# Altium PCB PumpBoard.PcbDoc
Units mil, origin at the board's own origin, x right, y up, seen from the top; angles counter-clockwise.
Board outline 2000 x 2751.27 mil, 2 copper layers (Top Layer, Bottom Layer), stack 30.756 mil thick; 70 components, 79 nets, 274 pads, 64 vias.
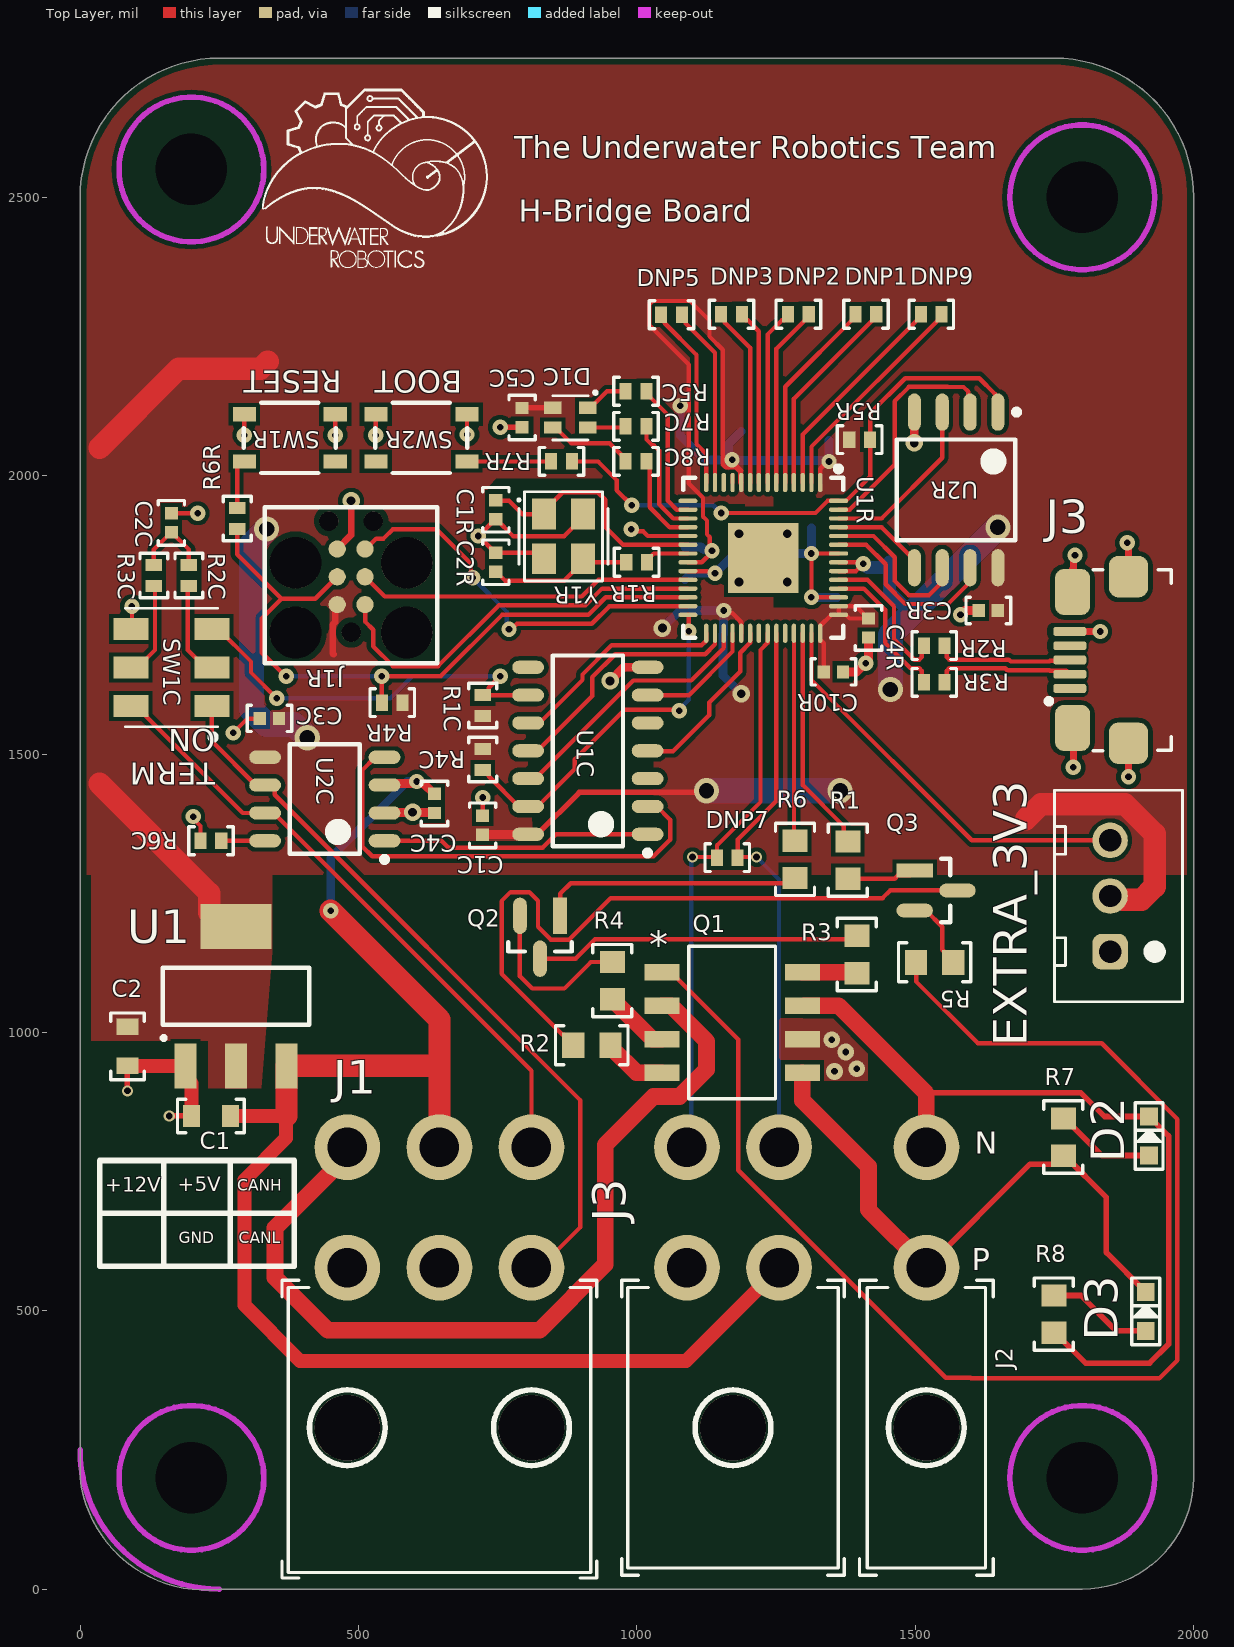
[diagram p0: Top Layer view]
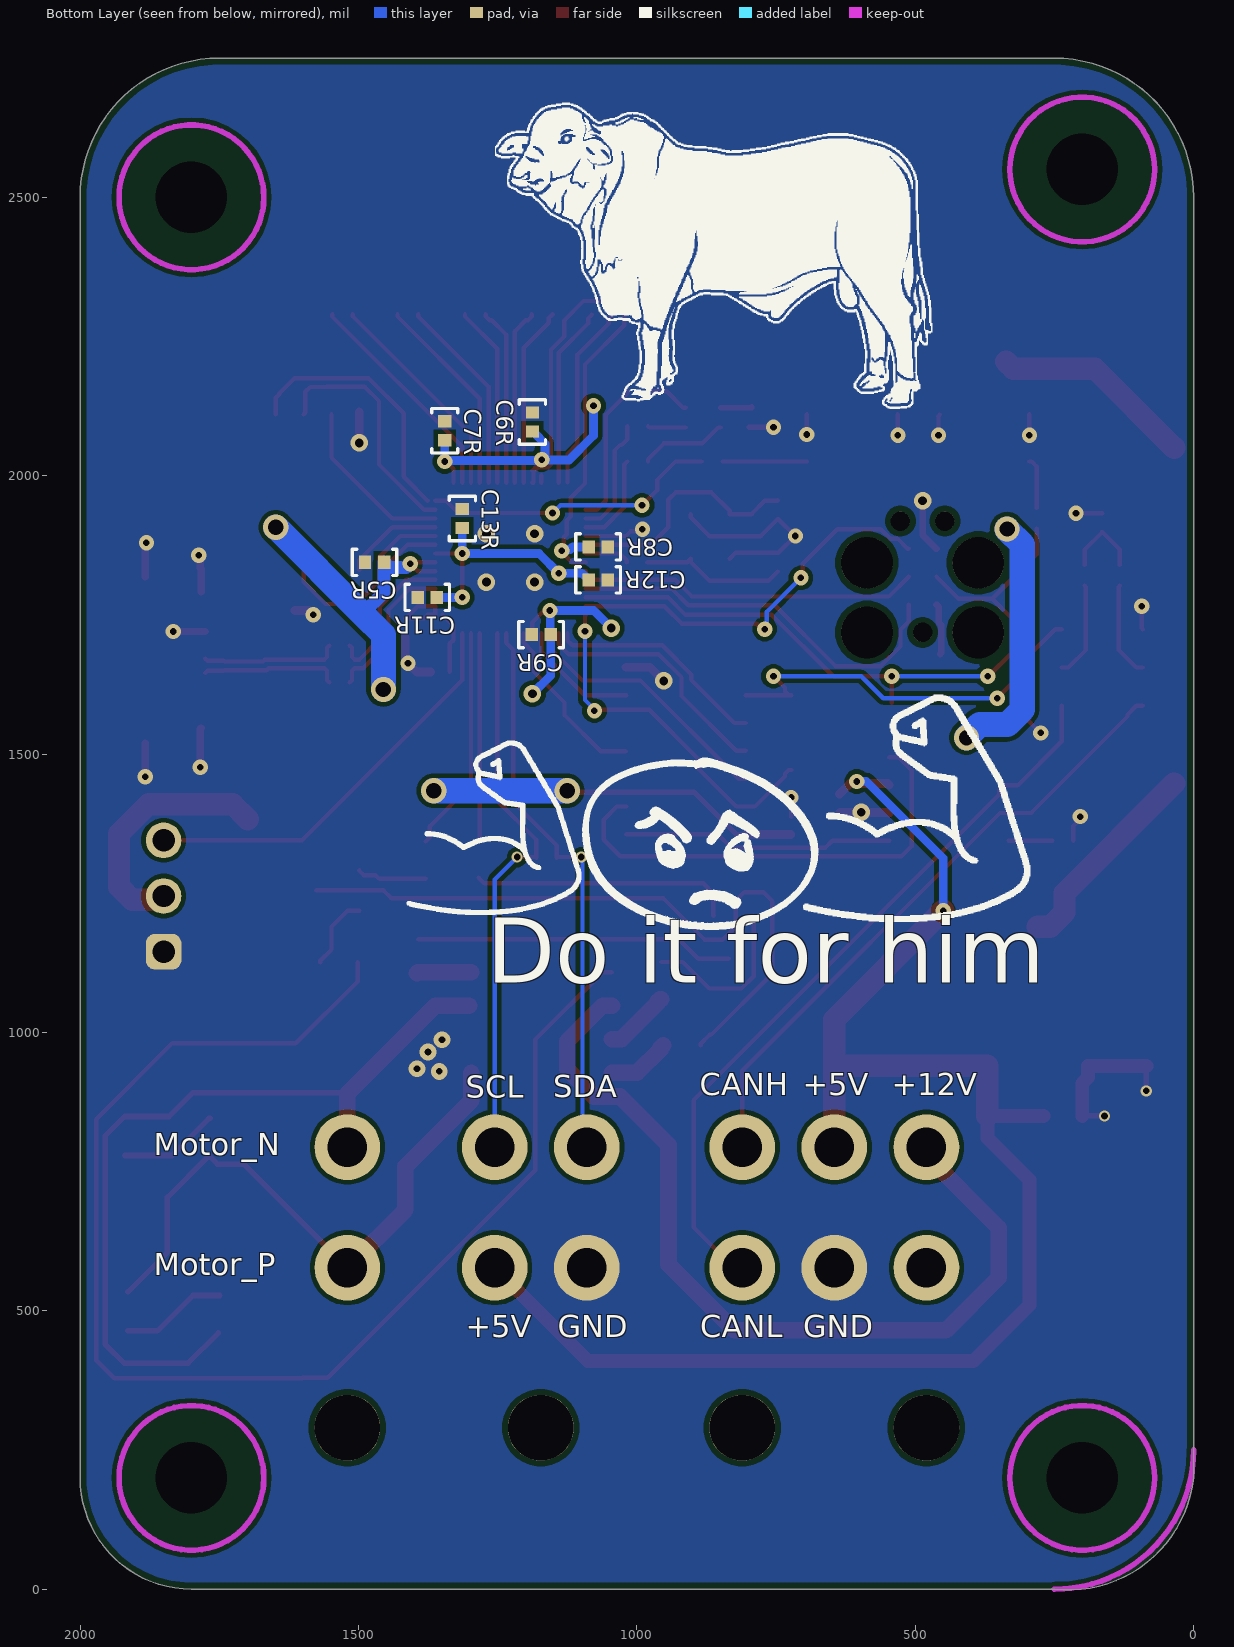
[diagram p1: Bottom Layer view, seen from below]
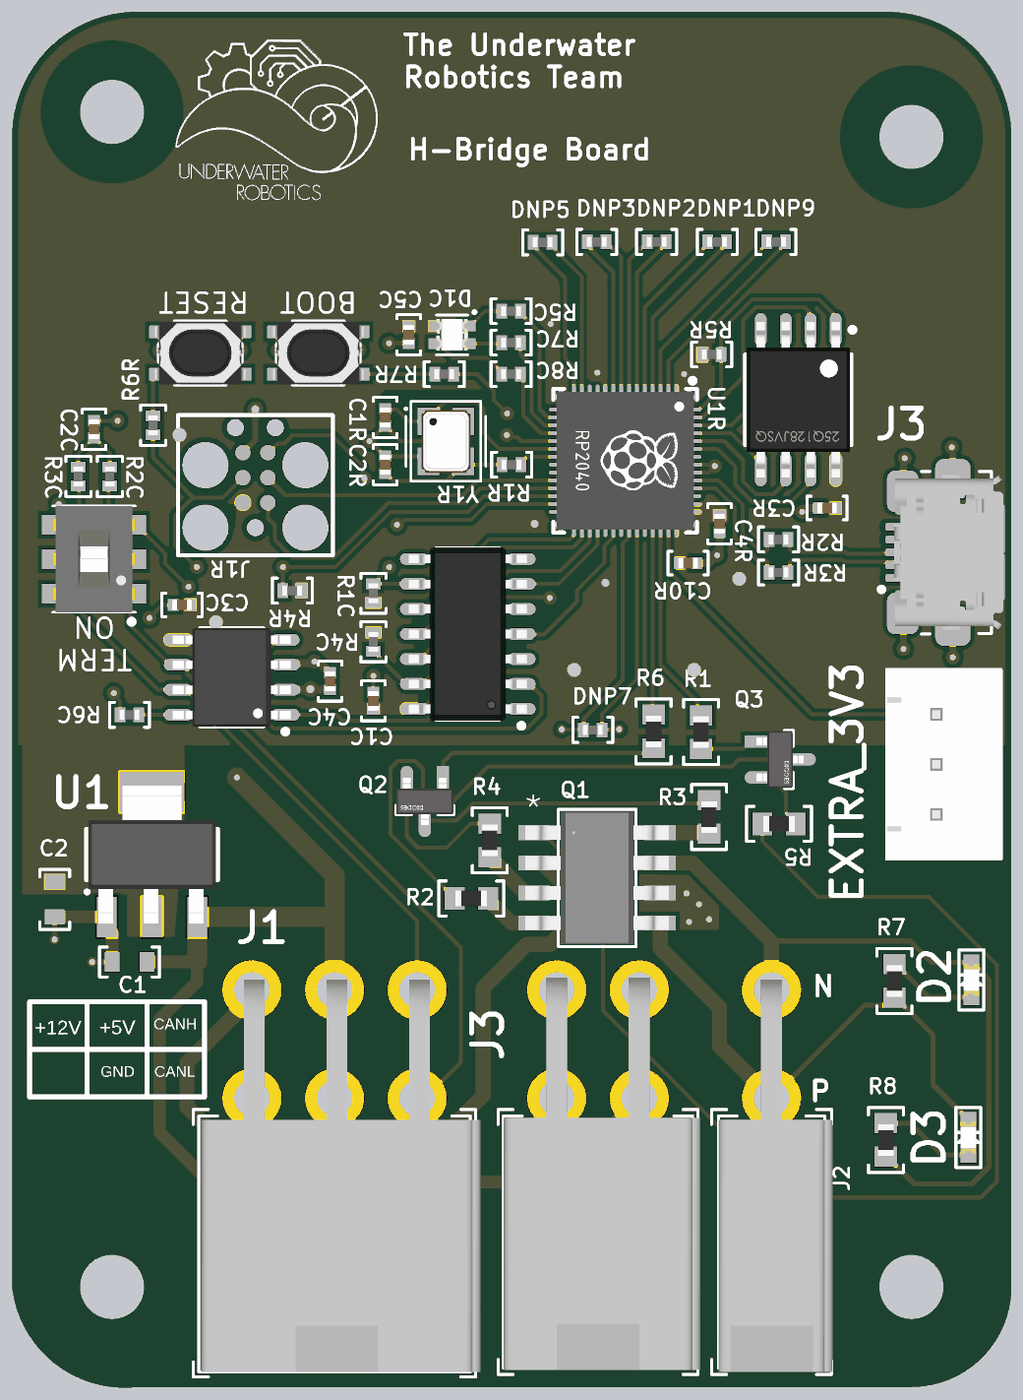
[diagram p2: 3D render of the assembled board from above, using the file's embedded part models]
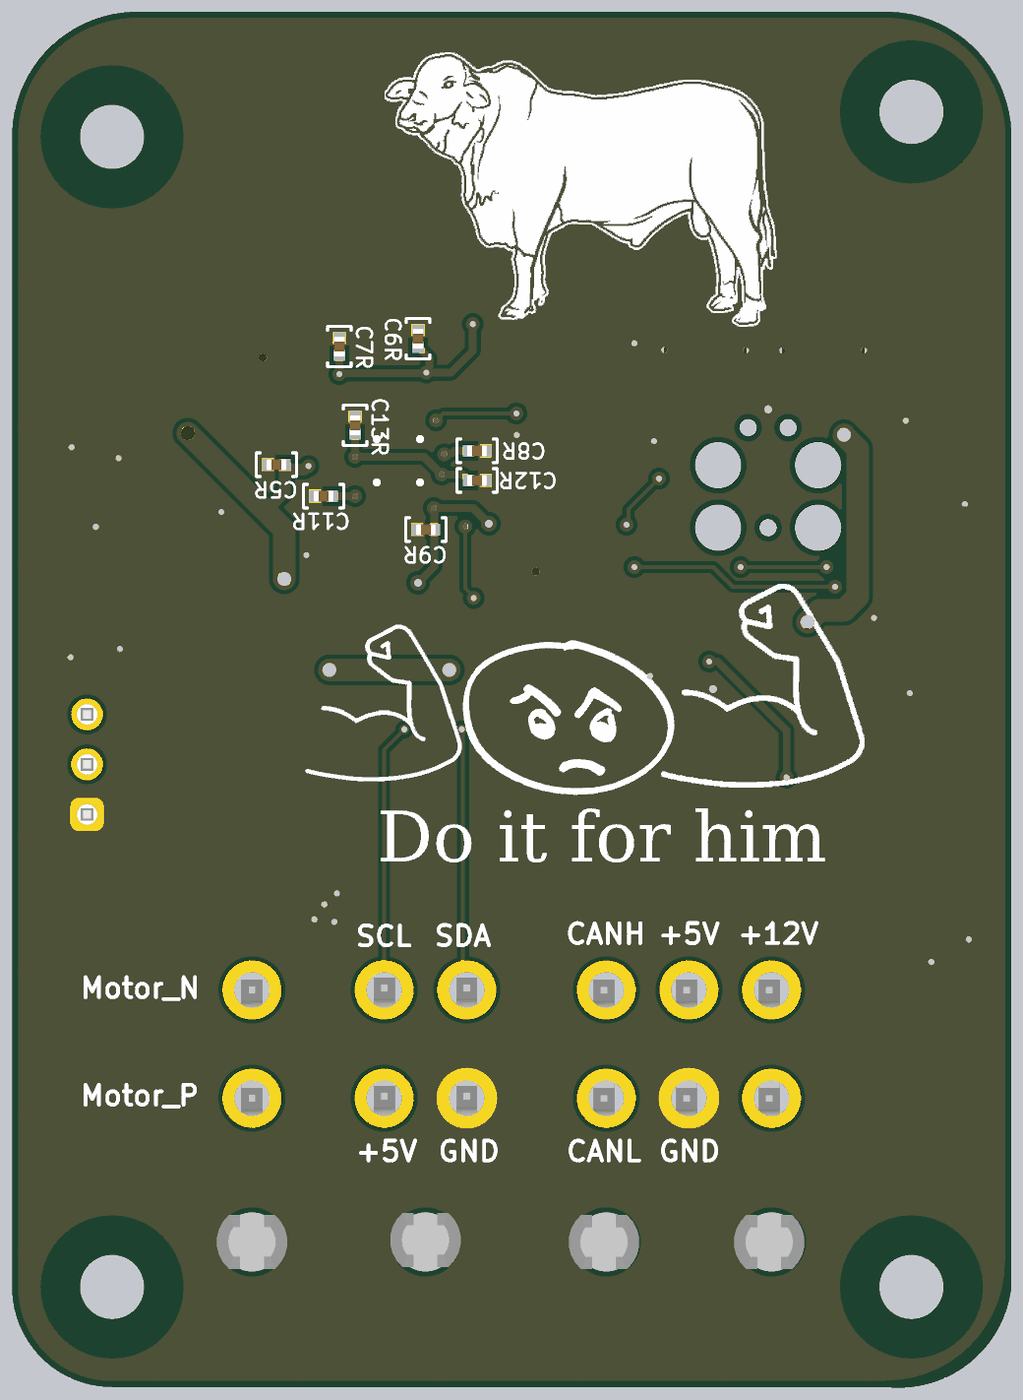
[diagram p3: 3D render of the assembled board from below, using the file's embedded part models]

## Layer stack, top to bottom
Top Solder: solder mask 1, SM-001, Dk 4
Top Layer: signal copper 1.378
Dielectric 3: core 28, Core-039, Dk 4.8
Bottom Layer: signal copper 1.378
Bottom Solder: solder mask 1, SM-001, Dk 4

## Board outline
250,2750 ccw(c249.99,2500.01) 0,2500 0,200 ccw(c225,225) 250,0 1800,0 ccw(c1800,200) 2000,200 2000,2500 ccw(c1750,2500) 1750,2750

## Design rules (kind name [scope] priority, off if disabled: settings)
AcuteAngle [All] p1: minimum=8.00000000000000E+0001 checktracksonly=FALSE
BoardOutlineClearance "BoardOutlineClearance JLCPCB" [All] p1: gap=11.81 ignorepadtopadclearanceinfootprint=FALSE
Clearance "Clearance JLCPCB 4 layer" [All] p1: gap=7.87 ignorepadtopadclearanceinfootprint=FALSE except(3.54: Arc-Arc Arc-Track Track-Track; 5: Arc-SMDPad Arc-Via Track-SMDPad Track-Via SMDPad-SMDPad; 9.45: THPad-THPad THPad-Via Via-Via; 10: Arc-Hole Track-Hole SMDPad-Hole THPad-Hole Via-Hole Fill-Hole Poly-Hole Region-Hole Text-Hole)
DiffPairsRouting "Diff Pairs USB 2.0" [InDifferentialPairClass('USB 2.0')] p1: maxlimit=5 minlimit=5 mostfreqgap=5 toplayer_minwidth=7.87 toplayer_maxwidth=7.87 toplayer_prefwidth=7.87 bottomlayer_minwidth=7.87 bottomlayer_maxwidth=7.87 bottomlayer_prefwidth=7.87 impedanceprofiledriven=TRUE impedanceprofileid={9C1C01C3-81FD-4AE1-9E3D-BC841176F5CA} maxuncoupledlength=500
DiffPairsRouting "Diff Pairs PCIe Gen 2" [InDifferentialPairClass('PCIe Gen 2')] p2: maxlimit=5 minlimit=5 mostfreqgap=5 toplayer_minwidth=5.53 toplayer_maxwidth=5.53 toplayer_prefwidth=5.53 bottomlayer_minwidth=5.53 bottomlayer_maxwidth=5.53 bottomlayer_prefwidth=5.53 impedanceprofiledriven=TRUE impedanceprofileid={D86E5A41-F98B-413D-93FD-A6E48D035561} maxuncoupledlength=500
HoleSize "HoleSize JLCPCB Pad" [IsPad] p1: absolutevalues=TRUE maxlimit=248.03 minlimit=19.68 maxpercent=80.000 minpercent=20.000
HoleSize "HoleSize JLCPCB 4 layer Cheap" [All] p2: absolutevalues=TRUE maxlimit=248.03 minlimit=11.81 maxpercent=80.000 minpercent=20.000
HoleToHoleClearance "HoleToHoleClearance JLCPCB Same Net" [All] p1: gap=10 allowstackedmicrovias=TRUE
MinimumAnnularRing "MinimumAnnularRing JLCPCB Via" [All] p1: minimumring=2.95
MinimumAnnularRing "MinimumAnnularRing JLCPCB Pad" [IsPad] p2: minimumring=9.84
MinimumAnnularRing "MinimumAnnularRing JLCPCB 1oz" [All] p3: minimumring=5.12
MinimumSolderMaskSliver "MinimumSolderMaskSliver JLCPCB" [All] p1: minsoldermaskwidth=3.94
PlaneClearance [All] p1: clearance=11.81
PlaneConnect [All] p1: planeconnectstyle=Direct reliefexpansion=20 reliefentries=4 reliefconductorwidth=10 reliefairgap=10
PolygonConnect [All] p1: connectstyle=Direct reliefconductorwidth=15 reliefentries=4 polygonreliefangle="45 Angle" airgapwidth=10
RoutingVias "RoutingVias JLCPCB 4 layer" [All] p1: holewidth=19.68 width=39.37 viastyle="Through Hole" minholewidth=11.81 minwidth=17.72 maxholewidth=50 maxwidth=80 useviatemplates=TRUE viatemplateguid#1={49E2BE90-FE79-4B27-AABE-BFC2E772B901} viatemplateguid#2={D46B7223-4E4A-4F23-8FAF-C4DF7C8E90C1} viatemplateguid#3={765874F7-E6F0-4236-BC5D-7B9C5F874F2D} viatemplateguid#4={F996ACF2-D524-42E9-8E13-092426774C3E} viatemplateguid#5={3CF2A4A2-37B0-4723-8AA0-2AAD64D1BBE4} viatemplateguid#6={2C31C44D-6249-4696-AAAA-426CA4CF5944} viatemplateguid#7={3EF28F81-8194-4598-9413-0EEE8DFD9FCF} viatemplatename#1=v51h30m0mx0 viatemplatename#2=v70h30m0mx0 viatemplatename#3=v70h30m0mx0(1) viatemplatename#4=v76h30m0mx0 viatemplatename#5=v80h40m0mx0 viatemplatename#6=v80h40m0mx0(1) viatemplatename#7=v115h70m0mx0
SilkToSilkClearance [All] p1: silktosilkclearance=3
SilkToSolderMaskClearance "SilkToSolderMaskClearance JLCPCB" [IsPad] p1: minsilkscreentomaskgap=5.91 clearancetoexposedcopper=TRUE
SolderMaskExpansion "SolderMaskExpansion JLCPCB" [All] p1: expansion=1.5 istentingtop=FALSE
SupplyNets "Schematic Supply Nets_3" [InNet('+5V')] p1: voltage=0.000
SupplyNets "Schematic Supply Nets_2" [InNet('GND')] p2: voltage=0.000
SupplyNets "Schematic Supply Nets_1" [InNet('+12V')] p3: voltage=0.000
SupplyNets "Schematic Supply Nets" [InNet('3V3_RP2CAN')] p4: voltage=0.000
UnRoutedNet [All] p1: checkbadconnections=TRUE
Width "Width JLCPCB 4 layer" [All] p1: maxlimit=196.85 minlimit=3.54 preferedwidth=9.84 minimp=50.000000 maximp=50.000000 favimp=50.000000
21 further rules are at their usual default settings.

## Classes and differential pairs
differential pair class "USB 2.0": USB USB_RP2040
component class U_RP2040_with_CAN: C1C C2C C3C C4C C5C D1C R1C R2C R3C R4C R5C R6C R7C R8C SW1C U1C U2C
component class U_RP2040_C: C1R C2R C3R C4R C5R C6R C7R C8R C9R C10R C11R C12R C13R J1R R1R R2R R3R R4R R5R R6R R7R SW1R SW2R U1R U2R Y1R
component class PumpControl: C1 C2 D2 D3 DNP1 DNP2 DNP3 DNP5 DNP7 DNP9 EXTRA_3V3 J1 J2 J3 Q1 Q2 Q3 R1 R2 R3 R4 R5 R6 R7 R8 U1
differential pair USB: +USB_P -USB_N
differential pair USB_RP2040: +USB_RP2040_P -USB_RP2040_N

## Components (designator, comment, footprint, x,y, rotation, side; value= is the part's Value field where it differs from the comment)
C1 "10uF Ceramic 6.3V" CAPACITOR_0603 235,850 r180 top
C1C "100nF Ceramic 25V" CAPACITOR_0402 723.03,1371.98 r90 top value=0.1uF
C1R "27pF Ceramic 50V" CAPACITOR_0402 746.65,1938.91 r270 top value=27pF
C2 "10uF Ceramic 6.3V" CAPACITOR_0603 85,975 r270 top
C2C "4700pF Ceramic 25V" CAPACITOR_0402 163.98,1915.28 r270 top value=4.7nF
C2R "27pF Ceramic 50V" CAPACITOR_0402 746.65,1844.42 r90 top value=27pF
C3C "100nF Ceramic 25V" CAPACITOR_0402 340,1564.1 r180 top value=0.1uF
C3R "100nF Ceramic 6.3V" CAPACITOR_0402 1631.3,1757.8 r180 top value=0.1uF
C4C "100nF Ceramic 25V" CAPACITOR_0402 636.42,1411.35 r270 top value=0.1uF
C4R "1uF Ceramic 16V" CAPACITOR_0402 1415.94,1726.31 r270 top value=1uF
C5C "1uF Ceramic 16V" CAPACITOR_0402 793.9,2104.26 r270 top value=1uF
C5R "100nF Ceramic 6.3V" CAPACITOR_0402 1471.06,1844.42 r0 bottom value=0.1uF
C6R "100nF Ceramic 6.3V" CAPACITOR_0402 1187.6,2096.39 r90 bottom value=0.1uF
C7R "100nF Ceramic 6.3V" CAPACITOR_0402 1345.08,2080.64 r90 bottom value=0.1uF
C8R "100nF Ceramic 6.3V" CAPACITOR_0402 1069.49,1872.08 r180 bottom value=0.1uF
C9R "100nF Ceramic 6.3V" CAPACITOR_0402 1171.85,1714.5 r0 bottom value=0.1uF
C10R "100nF Ceramic 6.3V" CAPACITOR_0402 1352.95,1647.57 r0 top value=0.1uF
C11R "1uF Ceramic 16V" CAPACITOR_0402 1376.57,1781.43 r0 bottom value=1uF
C12R "100nF Ceramic 6.3V" CAPACITOR_0402 1069.49,1812.92 r180 bottom value=0.1uF
C13R "100nF Ceramic 6.3V" CAPACITOR_0402 1313.58,1923.16 r90 bottom value=0.1uF
D1C "EAST1616RGBB4" LED_0606_4SMD 880.51,2104.26 r180 top
D2 "150060RS75000" LED_0603 1920,814 r90 top
D3 "IN-S63AT5G" LED_0603 1914,499 r90 top
DNP1 "DNP" RESISTOR_0402 1411.3,2290 r0 top
DNP2 "DNP" RESISTOR_0402 1290,2290 r180 top
DNP3 "DNP" RESISTOR_0402 1170,2290 r180 top
DNP5 "DNP" RESISTOR_0402 1062,2289 r0 top
DNP7 "DNP" RESISTOR_0402 1162.3,1314 r180 top
DNP9 "DNP" RESISTOR_0402 1528.7,2290 r0 top
EXTRA_3V3 "XH2.54 VERT" CONN_JST_XH254_3POS_VERT 1850,1145 r90 top
J1 "Mini-Fit Jr R/A" "CONN_MOLEX_MINIFIT JR_6 POS_R/A" 480,290 r0 top
J1R "TagConnect SWD" TC2030-MCP 486.81,1718.43 r90 top
J2 "Mini-Fit Jr R/A" "CONN_MOLEX_MINIFIT JR_2 POS_R/A" 1520,290 r0 top
J3 "Mini-Fit Jr R/A" "CONN_MOLEX_MINIFIT JR_4 POS_R/A" 1172.68,290 r0 top
J3 "USB_MICRO R/A" CONN_MINIUSB 1883,1669 r90 top
Q1 "ZHB6790TA" SOT-223-8 1171,1018 r0 top
Q2 "MMBT3904-7-F" FP-SOT23-IPC_A 826,1171 r270 top
Q3 "MMBT3904-7-F" FP-SOT23-IPC_A 1537.45,1254.98 r0 top
R1 "330 Ohm 1% 1/10W" RESISTOR_0603 1379,1309.5 r270 top
R1C "10k Ohm 1% 1/16W" RESISTOR_0402 723.03,1587.13 r90 top
R1R "1k Ohm 1% 1/16W" RESISTOR_0402 999.68,1844.42 r180 top
R2 "330 Ohm 1% 1/10W" RESISTOR_0603 919,977 r180 top
R2C "60.4 Ohm 1% 1/16W" RESISTOR_0402 195.47,1820.8 r90 top
R2R "27 Ohm 1% 1/16W" RESISTOR_0402 1534.06,1694.81 r180 top
R3 "330 Ohm 1% 1/10W" RESISTOR_0603 1395,1140 r90 top
R3C "60.4 Ohm 1% 1/16W" RESISTOR_0402 132.48,1820.8 r90 top
R3R "27 Ohm 1% 1/16W" RESISTOR_0402 1534.06,1628.8 r180 top
R4 "330 Ohm 1% 1/10W" RESISTOR_0603 956,1093 r90 top
R4C "10k Ohm 1% 1/16W" RESISTOR_0402 723.03,1490.09 r270 top
R4R "10k Ohm 1% 1/16W" RESISTOR_0402 560.63,1592.45 r180 top
R5 "330 Ohm 1% 1/10W" RESISTOR_0603 1535,1126 r180 top
R5C "604 Ohm 1% 1/16W" RESISTOR_0402 998.62,2151.5 r180 top
R5R "10k Ohm 1% 1/16W" RESISTOR_0402 1400.2,2064.89 r0 top
R6 "330 Ohm 1% 1/10W" RESISTOR_0603 1284,1311 r90 top
R6C "10k Ohm 1% 1/16W" RESISTOR_0402 234.84,1344.22 r180 top
R6R "1k Ohm 1% 1/16W" RESISTOR_0402 282.09,1923.16 r270 top
R7 "1k Ohm 5% 1/8W" RESISTOR_0603 1766,812 r270 top
R7C "200 Ohm 1% 1/16W" RESISTOR_0402 998.62,2088.51 r180 top
R7R "1k Ohm 1% 1/16W" RESISTOR_0402 864.76,2025.52 r0 top
R8 "1k Ohm 5% 1/8W" RESISTOR_0603 1749,494 r270 top
R8C "200 Ohm 1% 1/16W" RESISTOR_0402 998.62,2025.52 r180 top
SW1C "Switch DPDT" CAS-220TA 163.98,1655.44 r90 top
SW1R "434123025826" SMD_434123025826 376.57,2067.84 r180 top
SW2R "434123025826" SMD_434123025826 612.8,2067.84 r180 top
U1 "LM1117IMPX-3.3/NOPB" SOT-223-4 280,1065 r90 top
U1C "MCP2517FD" SOIC-14 912.01,1505.83 r180 top
U1R "RP2040" "QFN-56 RP2040" 1226.97,1852.29 r270 top locked
U2C "CAN Transceiver" SOIC-8 439.57,1419.22 r180 top
U2R "W25Q128JVSIQ" "SOIC-8 W25QxJV" 1573.43,1974.4 r270 top
Y1R "CRYSTAL 12.0000MHZ 18PF SMD" "4-SMD, NO LEAD CRYSTAL 3.2x2.5mm" 833.27,1931.03 r270 top

## Footprints (in the part's own frame and the unit in brackets; to place one, negate y for a bottom-side part, rotate by r counter-clockwise, add the part's x,y. Pads: shape width x height; smd on the part's side, far side on the other; paste and mask are expansions set on the pad)
"4-SMD, NO LEAD CRYSTAL 3.2x2.5mm" [mm]
  rrect0% 1.4x1.1 smd: 1(0,0) 2(2.032,0) 3(2.032,1.778) 4(0,1.778)
  silkscreen extent -1.02,-1.2 3.05,2.92, body extent -0.58,-0.36 2.62,2.14, height 0.82
CAPACITOR_0402 [mm]
  rect 0.56x0.6 smd: 1(-0.435,0) 2(0.435,0)
  silkscreen extent -1.02,-0.6 1.02,0.6, body extent -0.5,-0.28 0.5,0.27, height 0.51
CAPACITOR_0603 [mil] "CAPACITOR 0603"
  rect 30x40 smd: 1(-35,0) 2(35,0)
  silkscreen extent -60,-30 60,30, body extent -31,-16 32,16, height 31
CAS-220TA [mm] "SWITCH SLIDE DPDT 100MA 6V"
  rrect0% 1x1.6 smd: 1(-1.75,-1.85) 2(0,-1.85) 3(1.75,-1.85) 4(-1.75,1.85) 5(0,1.85) 6(1.75,1.85)
  silkscreen extent -3.3,-2.1 2.7,2.1, body extent -2.7,-2.1 2.7,2.1, height 2.51
CONN_JST_XH254_3POS_VERT [mm] "JST XH 2.54mm Pitch 3 Pos Vertical"
  rrect50% 1.62x1.62 hole 1.02: 1(0,0)
  round 1.62 hole 1.02: 2(2.54,0) 3(5.08,0)
  silkscreen extent -2.29,-3.3 7.37,2.54, body extent -2.34,-3.35 7.42,2.49, height 7.21
CONN_MINIUSB [mm] "USB2.0 Micro-B Receptacle SMD R/A"
  rrect50% 0.4x1.5 smd: 1(-1.3,2.675) 2(-0.65,2.675) 3(0,2.675) 4(0.65,2.675) 5(1.3,2.675)
  rrect50% 2.1x1.6 smd: 6(-3.1,2.55) 7(3.1,2.55)
  rrect50% 1.9x1.8 smd: 8(3.8,0) 9(-3.8,0)
  silkscreen extent -4.14,-1.96 4.11,3.75, body extent -3.96,-2.67 3.96,2.99, height 2.72
"CONN_MOLEX_MINIFIT JR_2 POS_R/A" [mm] "Molex Minifit Jr 5569 2 Pos R/A"
  round 3 hole 1.8: 1(0,7.3) 2(0,12.8)
  round 3 hole 3 unplated mask+0: ""(0,0)
  silkscreen extent -3.05,-6.73 3.05,6.73, body extent -2.7,-6.6 3.1,13.34, height 11.4
"CONN_MOLEX_MINIFIT JR_4 POS_R/A" [mm] "Molex Minifit Jr 5569 4 Pos R/A"
  round 3 hole 1.8: 1(2.1,7.3) 2(-2.1,7.3) 3(2.1,12.8) 4(-2.1,12.8)
  round 3 hole 3 unplated mask+0: ""(0,0)
  silkscreen extent -5.08,-6.73 5.08,6.73, body extent -4.8,-6.5 5.2,13.44, height 11.4
"CONN_MOLEX_MINIFIT JR_6 POS_R/A" [mm] "Molex Minifit Jr 5569 6 Pos R/A"
  round 3 hole 1.801: 1(8.4,7.3) 4(8.4,12.8)
  round 3 hole 1.8: 2(4.2,7.3) 3(0,7.3) 5(4.2,12.8) 6(0,12.8)
  round 3 hole 3 unplated mask+0: ""(0,0) ""(8.4,0)
  silkscreen extent -2.98,-6.86 11.38,6.73, body extent -2.58,-6.6 11.62,13.33, height 11.4
FP-SOT23-IPC_A [mm]
  rect 1.659x0.627 smd paste+0 mask+0: 1(-0.977,0.915)
  rrect100% 1.659x0.627 smd paste+0 mask+0: 2(-0.977,-0.915) 3(0.977,0)
  silkscreen extent 0.23,-1.45 0.65,1.45, body extent -2.31,-1.95 2.31,1.95, height 0.25
LED_0603 [mil] "LED 0603"
  rect 32x32 smd: 1(-35,0) 2(35,0)
  silkscreen extent -60,-25 60,25, body extent -31,-16 32,16, height 28
LED_0606_4SMD [mm]
  rrect0% 0.8x0.55 smd: 1(-0.8,-0.45) 2(-0.8,0.45) 3(0.8,0.45) 4(0.8,-0.45)
  silkscreen extent -1.22,-1.22 0.8,1.02, body extent -0.8,-0.8 0.8,0.8, height 0.35
"QFN-56 RP2040" [mm] "QFN, 56-Leads, Body 7.00x7.00mm, Pitch 0.40mm, Thermal Pad 3.10x3.10mm, IPC Medium Density"
  oval 0.875x0.2 smd: 1(-3.437,2.6) 2(-3.437,2.2) 3(-3.437,1.8) 4(-3.437,1.4) 5(-3.437,1) 6(-3.437,0.6) 7(-3.437,0.2) 8(-3.437,-0.2) 9(-3.437,-0.6) 10(-3.437,-1) 11(-3.437,-1.4) 12(-3.437,-1.8) 13(-3.437,-2.2) 14(-3.437,-2.6) 29(3.437,-2.6) 30(3.437,-2.2) 31(3.437,-1.8) 32(3.437,-1.4) 33(3.437,-1) 34(3.437,-0.6) 35(3.437,-0.2) 36(3.437,0.2) 37(3.437,0.6) 38(3.437,1) 39(3.437,1.4) 40(3.437,1.8) 41(3.437,2.2) 42(3.437,2.6)
  oval 0.2x0.875 smd: 15(-2.6,-3.437) 16(-2.2,-3.437) 17(-1.8,-3.437) 18(-1.4,-3.437) 19(-1,-3.437) 20(-0.6,-3.437) 21(-0.2,-3.437) 22(0.2,-3.437) 23(0.6,-3.437) 24(1,-3.437) 25(1.4,-3.437) 26(1.8,-3.437) 27(2.2,-3.437) 28(2.6,-3.437) 43(2.6,3.437) 44(2.2,3.437) 45(1.8,3.437) 46(1.4,3.437) 47(1,3.437) 48(0.6,3.437) 49(0.2,3.437) 50(-0.2,3.437) 51(-0.6,3.437) 52(-1,3.437) 53(-1.4,3.437) 54(-1.8,3.437) 55(-2.2,3.437) 56(-2.6,3.437)
  rect 3.2x3.2 smd: 57(0,0)
  silkscreen extent -4.19,-3.65 3.65,3.65, body extent -3.52,-3.52 3.52,3.52, height 0.85
RESISTOR_0402 [mm] "Resistor 0402"
  rect 0.55x0.75 smd: 1(-0.475,0) 2(0.475,0)
  silkscreen extent -1.02,-0.64 1.02,0.64, body extent -0.5,-0.25 0.5,0.25, height 0.25
RESISTOR_0603 [mil] "Resistor 0603"
  rect 40x45 smd: 1(-33.5,0) 2(33.5,0)
  silkscreen extent -65,-35 65,35, body extent -31,-16 32,16, height 16
SMD_434123025826 [mm]
  rect 1.05x0.65 smd: A1(-2.075,1.075) A2(2.075,1.075) B1(-2.075,-1.075) B2(2.075,-1.075)
  silkscreen extent -2.1,-1.6 2.1,1.6, body extent -2.3,-1.6 2.3,1.6, height 2.5
SOIC-8 [mm] "SOIC, 8-Leads, Body 4.90x3.90mm, Pitch 1.27mm, IPC Medium Density"
  oval 1.45x0.6 smd: 1(-2.725,1.905) 2(-2.725,0.635) 3(-2.725,-0.635) 4(-2.725,-1.905) 5(2.725,-1.905) 6(2.725,-0.635) 7(2.725,0.635) 8(2.725,1.905)
  silkscreen extent -2.85,-2.5 1.6,2.88, body extent -3,-2.5 3,2.5, height 1.75
"SOIC-8 W25QxJV" [mm] "SOIC, 8-Leads, Body 5.28x5.28mm, Pitch 1.27mm, IPC Medium Density"
  oval 1.7x0.6 smd: 1(-3.55,1.905) 2(-3.55,0.635) 3(-3.55,-0.635) 4(-3.55,-1.905) 5(3.55,-1.905) 6(3.55,-0.635) 7(3.55,0.635) 8(3.55,1.905)
  silkscreen extent -3.67,-2.7 2.3,2.88, body extent -3.95,-2.62 3.95,2.62, height 1.95
SOIC-14 [mm] "SOIC, 14-Leads, Body 8.65x3.90mm, Pitch 1.27mm, IPC Medium Density"
  oval 1.45x0.6 smd: 1(-2.725,3.81) 2(-2.725,2.54) 3(-2.725,1.27) 4(-2.725,0) 5(-2.725,-1.27) 6(-2.725,-2.54) 7(-2.725,-3.81) 8(2.725,-3.81) 9(2.725,-2.54) 10(2.725,-1.27) 11(2.725,0) 12(2.725,1.27) 13(2.725,2.54) 14(2.725,3.81)
  silkscreen extent -2.85,-4.35 1.6,4.78, body extent -3,-4.4 3,4.4, height 1.7
SOT-223-4 [mm]
  rect 2.05x1 smd paste+0 mask+0.102: 1(-3.175,2.3) 2(-3.175,0) 3(-3.175,-2.3)
  rect 2.05x3.25 smd paste+0 mask+0.102: 4(3.175,0)
  silkscreen extent -1.96,-3.35 1.3,3.35, body extent -3.5,-3.25 3.5,3.25, height 1.68
SOT-223-8 [mil]
  rect 63x30 smd paste+0 mask+0: 1(-126.2,90.35) 2(-126.2,30.12) 3(-126.2,-30.12) 4(-126.2,-90.35) 5(126.2,-90.35) 6(126.2,-30.12) 7(126.2,30.12) 8(126.2,90.35)
  silkscreen extent -78,-137 78,137, body extent -144,-132 144,132, height 67
TC2030-MCP [mil]
  round 31 smd: 1(50,-25) 2(50,25) 3(100,-25) 4(100,25) 5(150,-25) 6(150,25)
  round 34 hole 35 unplated: A(0,0) B(200,40) C(200,-40)
  round 92 hole 93 unplated: D(0,-100) E(125,-100) F(0,100) G(125,100)
  silkscreen extent -55,-155 225,155

## Part data
C1 C2: library part CAPACITOR_10uF_0603, "Cap 10uF 6.3V +/-20% / Ceramic 0603", Supplier Part Number 1=1276-1119-1-ND, Tolerance="+/- 20%", Value (uF)="10 uF", Voltage=6.3V, ComponentLink1Description=Digikey, ComponentLink1URL=https://www.digikey.com/en/products/detail/samsung-electro-mechanics/CL10A106MQ8NNNC/3886777, Made By="Flip B", Supplier 1=Digi-Key
C1C C3C C3R C4C C5R C6R C7R C8R C9R C10R C12R C13R: library part CAPACITOR_0.1uF_0402, "Cap 100nF 25V +/-10% / Ceramic 0402", Supplier Part Number 1=478-7868-1-ND, Tolerance="+/- 10%", Voltage=25V, Made By="Robert Pafford", Supplier 1=Digi-Key
C1R C2R: library part CAPACITOR_0.000027uF_0402, "Cap 27pF 50V +/-5% / Ceramic 0402", Supplier Part Number 1=445-5589-1-ND, Tolerance="+/- 5%", Voltage=50V, Made By="Robert Pafford", Supplier 1=Digi-Key
C2C: library part CAPACITOR_0.0047uF_0402, "4700 pF +/-10% 25V Ceramic Capacitor X7R 0402", Supplier Part Number 1=478-6195-1-ND, Tolerance="+/- 10%", Voltage=25V, Made By="Robert Pafford", Supplier 1=Digi-Key
C4R C5C C11R: library part CAPACITOR_1uF_0402, "Cap 1uF 16V +/-10% / Ceramic 0402", Supplier Part Number 1=478-0402YD105KAT4ADKR-ND, Tolerance="+/- 10%", Voltage=16V, Made By="Robert Pafford", Supplier 1=Digi-Key
D1C: library part LED_RGB_4SMD, "LED RGB CLEAR 4SMD", Blue Forward Current=5mA, Blue Forward Voltage=2.8V, Color=RGB, Package=4-SMD, Red Forward Voltage=1.8V, Supplier Part Number 1=1080-1552-1-ND, ComponentLink1Description=Datasheet, ComponentLink1URL=https://everlightamericas.com/index.php?controller=attachment&id_attachment=3220, Green Forward Current=5mA, Green Forward Voltage=2.8V, Made By="Robert Pafford", Red Forward Current=5mA, Supplier 1=Digi-Key
D2: library part LED_Red_0603, "LED Red Vf= 2V If = 0.020A / 150060RS75000", Color=Red, Forward Current=20mA, Forward Voltage=2V, Package=0603, Supplier Part Number 1=732-4978-1-ND, Made By="Robert Pafford", Supplier 1=Digi-Key
D3: library part LED_Green_0603_3V, "LED Green Vf= 3V If = 0.005A / IN-S63AT5G", Color=Green, Forward Current=5mA, Forward Voltage=3V, Package=0603, Supplier Part Number 1=1830-1062-1-ND, ComponentLink1Description=Datasheet, ComponentLink1URL=https://www.we-online.de/katalog/datasheet/150060GS75000.pdf, Made By="Robert Pafford", Supplier 1=Digi-Key
DNP1 DNP2 DNP3 DNP5 DNP7 DNP9: library part DNP_0402, "Do Not Populate 0402"
EXTRA_3V3: library part CONN_JST_XH254_3POS_VERT, "JST XH 2.54mm Pitch 3 Pos Vertical", Color=White, Current Per Pin=4A, Manufacturer=JST, ComponentLink1Description="Purchase Link", ComponentLink1URL=https://www.amazon.com/460PCS-XH2-54-Connector-Terminal-Connectors/dp/B09DBGVX5C, Configuration=Vertical, Created By="Robert P", NOTE="Do not use JST 2.5mm parts with this footprint. JST does not make 2.54mm pitch pins, rather only clones make this connector!", Number of Positions=3, Pitch=2.54mm, Series="XH 2.54"
J1: library part "CONN_MOLEX_MINIFIT JR_6POS_R/A", "Molex Minifit Jr. 5569  / 6 Pos R/A Natural", Color=Natural, Current Per Pin=13A, Manufacturer=Molex, Supplier Part Number 1=WM1353-ND, ComponentLink1Description=Datasheet, ComponentLink1URL=https://www.molex.com/pdm_docs/ps/PS-5556-001.pdf, Configuration="Right Angle", Created By="Flip B", Number of Positions=8, Pitch=4.2mm, Series="Minifit Jr 5569", Supplier 1=Digi-Key
J1R: library part TC2030_SWD, "TagConnect TC2030 ARM SWD 6-pin"
J2: library part "CONN_MOLEX_MINIFIT JR_2POS_R/A", "Molex Minifit Jr. 5569  / 2 Pos R/A Natural", Color=Natural, Current Per Pin=13A, Manufacturer=Molex, Supplier Part Number 1=WM1351-ND, ComponentLink1Description=Datasheet, ComponentLink1URL=https://www.molex.com/pdm_docs/sd/026013115_sd.pdf, Configuration="Right Angle", Created By="Robert P", Number of Positions=2, Pitch=4.2mm, Series="Minifit Jr 5569", Supplier 1=Digi-Key
J3: library part "CONN_MOLEX_MINIFIT JR_4POS_R/A", "Molex Minifit Jr. 5569  / 4 Pos R/A Natural", Color=Natural, Current Per Pin=13A, Manufacturer=Molex, Supplier Part Number 1=WM13112-ND, ComponentLink1Description=Datasheet, ComponentLink1URL=https://www.molex.com/pdm_docs/sd/026013115_sd.pdf, Configuration="Right Angle", Created By="Flip B", Number of Positions=4, Pitch=4.2mm, Series="Minifit Jr 5569", Supplier 1=Digi-Key
J3: library part CONN_MICROUSB, "Amphenol Micro USB-B / USB2.0 5 Pin Right Angle SMD", Color=Silver, Current Per Pin=1.8A, Manufacturer=Amphenol, Supplier Part Number 1=609-4613-1-ND, ComponentLink1Description=Datasheet, ComponentLink1URL=https://cdn.amphenol-icc.com/media/wysiwyg/files/documentation/datasheet/inputoutput/io_usb_micro.pdf?__cf_chl_jschl_tk__=05693735e19256298f6ef6ca2bb2e65c376a4f56-1625503833-0-Abitsb0-ufjOXJYs_S3J3r2iTn-nObalbmXUksF1VvO_h_WEmRdMlUD1I8-hmWSEVWzY1pirKnrPZWfgY3851qyBZe5ZvnNQePLGIzUgdEIQBVUyW36RsbYpDLEWxJ4horD-5gChFgobLYqwmG5aHl0E8lIn_twwPPrOxilK2gP0q9t_CNOs_u5fMqXvXUrlsOv8tIE2NRlu6NVP8qtkL2GjhlkeTUbDMF8WvvpPDTFOgvZ4Y16Ej8F8AhWos88mo5B1HssXozw0XrkJQIqERITUu6rqloz9kf4ZzhBHtDAt-IkiAFY_Ds9SW8FYKKTtINJVpHZQ6Gyu1FFM4Dc9MO0maE8_mmNcwlxqyRoRk_MPWW8VyByXWM5RSp52jteRKw7FeI9WIYvCbPAOy0Eyib-aseIQsnGbglBcUY6_2xp8GYaJM38H3dNvBPsSOfJBPndKedwKHllxjkucXn6xsN0sDXkpGN-cu8_2bDTJ0g-uUucKSCooYX-ApSDNGpkA_p9zv1SOAD8c0zaZVmtiBsN75QpVz2rzq9_BFxOywPvR, Configuration="Right Angle", Created By="Flip B", Number of Positions=5, Pitch=0.65mm, Series=10118192, Supplier 1=Digi-Key
Q1: "TRANS 2NPN/2PNP 40V 2A SM8", Current - Collector (IC) (Max)=2A, Package=SOT-223-8, Supplier Part Number 1=ZHB6790CT-ND, Voltage - CE Breakdown=40V, Supplier 1=Digikey
Q2 Q3: library part CMP-2000-04931-2, "TRANS NPN 40V 0.2A SMD SOT23-3", Case/Package=SOT-23, Collector Base Voltage (VCBO)=60V, Collector Emitter Breakdown Voltage=40V, Collector Emitter Saturation Voltage=300mV, Continuous Collector Current=200mA, Emitter Base Voltage (VEBO)=6V, Frequency=300MHz, Max Operating Temperature=150°C, Max Power Dissipation=300mW, Min Operating Temperature=-55°C, Package Quantity=3000, Power Dissipation=350mW, Collector Emitter Voltage (VCEO)=40V, Contact Plating=Tin, Element Configuration=Single, Gain Bandwidth Product=300MHz, Height=1mm, hFE Min=100, Lead Free="Lead Free", Length=3.05mm, Max Breakdown Voltage=40V, Max Collector Current=200mA, Max Frequency=300MHz, Mount="Surface Mount", Number of Elements=1, Number of Pins=3, Packaging="Tape and Reel", Polarity=NPN, Radiation Hardening=No, REACH SVHC="No SVHC", Transition Frequency=300MHz, Voltage Rating (DC)=40V, Weight=0.000282oz, Width=1.4mm
R1 R2 R3 R4 R5 R6: library part RESISTOR_330_0603, "RES 330 OHM 1% 1/10W 0603", Supplier Part Number 1=P330HCT-ND, Tolerance="+/- 1%", Value  (Ohms)=330, Made By="Robert Pafford", Supplier 1=Digi-Key, Wattage=1/10W
R1C R4C R4R R5R R6C: library part RESISTOR_10K_0402, "RES 10k OHM 1% 1/16W 0402", Digikey Part Numer=CR0603-JW-104ELFTR-ND, Supplier Part Number 1=YAG3436CT-ND, Tolerance="+/- 1%", Value  (Ohms)=10K, Made By="Robert Pafford", Supplier=Digikey, Supplier 1=Digi-Key, Wattage=1/16W
R1R R6R R7R: library part RESISTOR_1K_0402, "RES 1k OHM 1% 1/16W 0402", Digikey Part Numer=CR0603-JW-104ELFTR-ND, Supplier Part Number 1=13-AC0402FR-131KLCT-ND, Tolerance="+/- 1%", Value  (Ohms)=1K, Made By="Robert Pafford", Supplier=Digikey, Supplier 1=Digi-Key, Wattage=1/16W
R2C R3C: library part RESISTOR_60.4_0402, "RES 60.4 OHM 1% 1/16W 0402", Digikey Part Numer=CR0603-JW-104ELFTR-ND, Supplier Part Number 1=13-AC0402FR-0760R4LCT-ND, Tolerance="+/- 1%", Value  (Ohms)=60.4, Made By="Robert Pafford", Supplier=Digikey, Supplier 1=Digi-Key, Wattage=1/16W
R2R R3R: library part RESISTOR_27_0402, "RES 27 OHM 1% 1/16W 0402", Digikey Part Numer=CR0603-JW-104ELFTR-ND, Supplier Part Number 1=YAG5278DKR-ND, Tolerance="+/- 1%", Value  (Ohms)=27, Made By="Robert Pafford", Supplier=Digikey, Supplier 1=Digi-Key, Wattage=1/16W
R5C: library part RESISTOR_604_0402, "RES 604 OHM 1% 1/16W 0402", Digikey Part Numer=CR0603-JW-104ELFTR-ND, Supplier Part Number 1=13-AC0402FR-07604RLCT-ND, Tolerance="+/- 1%", Value  (Ohms)=604, Made By="Robert Pafford", Supplier=Digikey, Supplier 1=Digi-Key, Wattage=1/16W
R7 R8: library part RESISTOR_1K_0603, "RES 1k OHM 5% 1/8W 0603", Digikey Part Numer=CR0603-JW-104ELFTR-ND, Supplier Part Number 1=2019-RK73B1JTTD102JCT-ND, Tolerance="+/- 5%", Value  (Ohms)=1K, ComponentLink1Description=Datasheet, ComponentLink1URL=https://www.bourns.com/docs/product-datasheets/CRxxxxx.pdf, Made By="Robert Pafford", Supplier=Digikey, Supplier 1=Digi-Key, Wattage=1/8W
R7C R8C: library part RESISTOR_200_0402, "RES 200 OHM 1% 1/16W 0402", Digikey Part Numer=CR0603-JW-104ELFTR-ND, Supplier Part Number 1=YAG3453CT-ND, Tolerance="+/- 1%", Value  (Ohms)=200, Made By="Robert Pafford", Supplier=Digikey, Supplier 1=Digi-Key, Wattage=1/16W
SW1C: library part CAS-220TA_CAN_TERM, "GOLD SWITCH FLUSH SLIDE DPDT 100MA 6V", Current Rating="100 mA", Supplier Part Number 1=CAS220JCT-ND, Voltage Rating=6VDC, Contact Finish=Gold, Made By="Robert Pafford", Supplier 1=Digi-Key, Switch Function=DPDT
SW1R SW2R: library part "Tactile Switch SMD", "WS-TASV J-Bend SMT Tact Switch, SPST-NO, 16VDC, 50mA, 260g", Manufacturer="Wurth Elektronik", Operating Temperature Max=85°C, Operating Temperature Min=-40°C, Rated Current=50mA, Rated Voltage=16VDC, Category="Tact Switches", Circuit=SPST-NO, ComponentLink1Description="Website Link", ComponentLink1URL=https://www.we-online.com/redexpert/article/434123025826?ad, ComponentLink2Description="Datasheet Link", ComponentLink2URL=https://www.we-online.com/redexpert/spec/434123025826?ad, Contact Material="Stainless Steel", Contact Plating=Silver, Height=2.5mm, Length=4.2mm, Manufacturer Part Number=434123025826, Match Code=WS-TASV, Mount="Surface Mount", Operation Force=260g, Packaging="Tape and Reel", Terminal Material="Copper Alloy", Terminal Plating=Silver, Washable=No, Width=3.2mm
U1: "IC REG LIN 3.3V 800MA SOT223-4", Manufacturer="Texas Instruments", Package=SOT-223-4, PartNumber=LM1117IMP-3.3/NOPB, Supplier Part Number 1=LM1117IMPX-3.3/NOPBCT-ND, Amp Out=800mA, Created By="Dylan T", Supplier 1=Digi-Key, Vin (Max)=15V, Vout (Min/Fixed)=3.3V
U1C: "CANbus Controller CAN 2.0 SPI Interface 14-SOIC", Made By="Robert Pafford", Max FD Rate="8 Mbps"
U1R: "Raspberry Pi RP2040", Crystal Frequency="12 MHz", Input Voltage=3.3V, Available Busses="SPI, I2C, PWM, USB", ComponentLink1Description=DigiKey, ComponentLink2Description=Datasheet, ComponentLink2URL=https://datasheets.raspberrypi.org/rp2040/rp2040-datasheet.pdf, Made By="Robert Pafford", Number of GPIOs=29
U2C: library part TJA1442AT, "CAN Interface IC High-Speed CAN Transceiver with Standby Mode", Supplier Part Number 1=771-TJA1442AT/0Z, Made By="Robert Pafford", Max Data Rate=5Mbps, Supplier 1=Mouser
U2R: "IC FLASH 128MBIT SPI/QUAD 8SOIC", Supplier Part Number 1=W25Q128JVSIQ-ND, Made By="Robert Pafford", Size=128M, Supplier 1=Digi-Key
Y1R: library part CRYSTAL_12MHz_SMD_SMALL, "12 MHz ±20ppm Crystal 18pF 100 Ohms 4-SMD, No Lead (3.2x2.5mm)", Frequency="12 MHz", Load Capacitance=18pF, Supplier Part Number 1=2151-RH100-12.000-18-2030-EXT-TRCT-ND, ESR="100 Ohms", Made By="Robert Pafford", Supplier 1=Digi-Key

## Free pads (board coordinates)
  rrect50% 0x0 hole 128.5 unplated mask+4: 7(200,200) 7(200,2550) 7(1800,200) 7(1800,2500)

## Via types
v1: diameter 27.56, hole 11.81, Top Layer to Bottom Layer, tented both sides, 40 vias
v2: diameter 31.5, hole 15.75, Top Layer to Bottom Layer, tented both sides, 10 vias
v3: diameter 45.28, hole 27.56, Top Layer to Bottom Layer, tented both sides, 6 vias
v4: diameter 30, hole 12, Top Layer to Bottom Layer, tented both sides, 4 vias
v5: diameter 20, hole 12, Top Layer to Bottom Layer, 2 vias
v6: diameter 20, hole 12, Top Layer to Bottom Layer, tented both sides, 2 vias

## Nets (pads, with @x,y where several pads share a name; then routed paths per layer and width w, separated by ;. In a path a pad name is that pad's centre, name@x,y a point inside that pad or via, vN(x,y) a via of type N, cw(c..) or ccw(c..) an arc to the next point about the centre after c; other vN are vias at no path point)
1v1_RP2040: C11R.1 C12R.1 C13R.1 U1R.23 U1R.45 U1R.50 | length 566.9
  Top Layer w7.87: U1R.23 1127.15,1828.67 1135.03,1820.8 v1@1140.35,1820.8 ; U1R.45 v1(1313.58,1781.43) v1(1313.58,1860.17) U1R.50
  Bottom Layer w15.75: C12R.1 1086.61,1813.71 1093.7,1820.8 1094.49,1820.8 1098.53,1824.84 v1(1140.35,1824.84) 1175.68,1860.17 v1(1313.58,1860.17) C13R.1 ; v1(1313.58,1781.43) C11R.1
3V3_RP2CAN: C1C.1 C2.1 C3C.1 C3R.1 C4R.1 C5C.1 C5R.1 C6R.1 C7R.1 C8R.1 C9R.1 C10R.1 D1C.4 EXTRA_3V3.2 J1R.2 R1C.1 R4C.1 R4R.1 R5R.1 U1.2 U1.4 U1C.14 U1R.1 U1R.10 U1R.22 U1R.33 U1R.42 U1R.43 U1R.44 U1R.48 U1R.49 U2C.5 U2R.8 | length 5238.6
  Top Layer w7.87: C1C.1 C1C.1@723.52,1355.34 ; U1R.22 1116.73,1844.42 1135,1862.69 v1(1135,1865) 1131.23,1868.77 1131.23,1889.29 1126,1894.53 1126,1919.33 1118.8,1926.54 1118.8,1960.53 1110.73,1968.59 1093.17,1986.15 1093.17,2199.48 1022.54,2270.12 1022.54,2307.88 1028.36,2313.7 1095.64,2313.7 1130.54,2278.81 1130.54,2250.09 1154.23,2226.39 1154.23,2038.16 1154.23,2020.14 1159.58,2014.79 1177.6,2014.79 1185.72,2006.66 1185.72,1987.63 U1R.10 ; v1(1156.1,1757.8) 1159.87,1754.04 1170.33,1754.04 1187.6,1736.77 U1R.33 ; v1(1170.98,2028.62) 1170.98,2025.66 1179.73,2016.92 1187.6,2009.04 ; U1R.1 1329.33,2012.66 1342.19,2025.52 v1(1345.08,2025.52) ; C10R.1 1335.83,1699.06 1331.21,1703.67 1329.33,1703.67 U1R.42 1329.33,1730.24 U1R.43@1349.02,1749.93 ; U1R.48 1393.67,1828.67 1407,1842 1404.58,1844.42 U1R.49 ; C4R.1 C4R.1@1415.16,1743.43 ; C4R.1@1415.16,1743.43 1408.07,1750.52 1408.07,1751.31 1393.7,1765.68 U1R.44 U1R.43 1375.59,1749.93 1382.09,1743.43 C4R.1@1415.16,1743.43
  Top Layer w9.84: C5C.1@793.9,2124.09 796.31,2121.68 848.72,2121.68 D1C.4 ; U1C.14@804.23,1355.34 820.96,1355.34 896.85,1431.23 1122.13,1431.23 v3(1125,1434.1)
  Top Layer w10: C5C.1@793.9,2121.96 C5C.1@793.9,2124.09
  Top Layer w11.81: 455.32,1679.06 453.41,1680.97 453.41,1732.27 458.14,1737 458.14,1764.76 J1R.2
  Top Layer w15.75: C1C.1@723.52,1355.34 U1C.14@804.23,1355.34
  Top Layer w40: 35,1447 232.01,1249.99 232.01,1215.35 257.37,1190 U1.4 ; 35,2050 177,2192 324,2192 337,2205 ; 1699,1383 1725.89,1409.89 1876.88,1409.89 1930,1356.77 1930,1261.81 1906.57,1238.38 1873.43,1238.38 1871.36,1240.45 1854.55,1240.45 EXTRA_3V3.2
  Bottom Layer w15.75: v2(1045.87,1726.31) 1077.36,1757.8 v1(1156.1,1757.8) ; v1(1077.96,2125.71) 1077.96,2072.17 1122.13,2028 1170.36,2028 v1(1170.98,2028.62) 1172.53,2027.07 v1@1345.08,2027.07 ; C8R.1 1115.24,1872.08 1120.06,1867.26 1132.74,1867.26 v1(1135,1865) ; v1@1155.41,1749.93 1155.41,1715.19 C9R.1 1154.72,1641.07 v2(1187.6,1608.2) ; v1@1165,2037.79 1165,2057.45 1183.66,2076.11 1184.45,2076.11 C6R.1 ; v1(1345.08,2025.52) v1@1345.08,2027 ; C7R.1 v1@1345.08,2027.07 ; v1@1346,2027 1345.93,2027.07 v1@1345.08,2027.07
  Bottom Layer w23.62: v1(1406.75,1841.75) 1407.81,1841.75 1414.56,1835 1444.52,1835 C5R.1 1453.94,1835 1453.94,1790.68 1492.82,1751.8
  Bottom Layer w45.28: v3(335,1904.1) 335,1903.54 307.67,1876.21 307.67,1580.21 334.61,1553.28 384.25,1553.28 v3(408.07,1529.46) ; v3(1125,1434.1) v3(1365,1434.1) ; v3(1455.32,1616.07) 1455.32,1714.3 1492.82,1751.8 v3(1648.43,1907.41)
+5V: C1.1 C4C.1 J1.5 J3.1@1255.35,577.4 U1.3 U2C.3 | length 2818.3
  Top Layer w15.75: U2C.3 549.86,1447.23 601.44,1447.23 v1(604.92,1450.72) 608.69,1446.95 617.15,1446.95 635.63,1428.47 C4C.1
  Top Layer w25: C1.1 370,850 ; 370,845 370,810 295,735 295,510 395,410 1087.95,410 J3.1@1247.95,570
  Top Layer w40: 370.55,850 U1.3 645.35,940 ; v1(449.92,1218.72) 645.35,1023.28 645.35,940 ; J1.5@645.35,778.94 645.35,940
  Bottom Layer w15: v1(449.92,1218.72) 449.92,1313.17 587.75,1451 v1@603,1451
+12V: J1.6 Q1.2 | length 1564.9
  Top Layer w30: J1.6@480,778.94 350,648.94 350,560 445,465 825,465 943.03,583.03 943.03,798.03 1030,885 1076.94,885 1125,933.06 1125,984.42 1061.3,1048.12 Q1.2
CANCLK_RP2CAN: U1C.6 U1R.32 | length 217.8
  Top Layer w7.87: U1C.6 1093.58,1605.83 1171.85,1684.1 U1R.32
CANH: J1.4 SW1C.4 U2C.7 | length 1141.6
  Top Layer w7.87: SW1C.4 102.95,1586.54 118.7,1570.8 118.7,1567.45 291.93,1394.22 347.78,1394.22 810.71,931.29 810.71,787.29 J1.4@814,784
CANL: J1.1 SW1C.1 U2C.6 | length 1339.4
  Top Layer w8: SW1C.1 236.81,1522.96 315.55,1444.22 342.27,1444.22 349.49,1437 349.49,1427.02 898,878.5 898,649.69 818.31,570 J1.1@818,570
CANRX_RP2CAN: U1C.2 U2C.4 | length 845.6
  Top Layer w7.87: U2C.4 530.12,1494.22 506.5,1470.6 506.5,1334.44 524.66,1316.27 1029.86,1316.27 1059.65,1346.05 1059.65,1382.21 1036.02,1405.83 U1C.2
CANTX_RP2CAN: U1C.1 U2C.1 | length 487.4
  Top Layer w7.87: U2C.1 649.19,1344.22 661.4,1332.02 831.04,1332.02 854.86,1355.83 U1C.1
DBG_TX_RP2040: J1R.5 U1R.27 | length 714.8
  Top Layer w7.87: J1R.5 513.31,1868.43 531.87,1887 544.9,1887 561.78,1903.87 639.96,1903.87 702.17,1841.66 702.17,1819.63 v1(705.31,1816.49) ; v1(770.28,1724.34) 774.89,1724.34 784.73,1734.18 919.15,1734.18 950.64,1765.68 U1R.27
  Bottom Layer w7.87: v1(705.31,1816.49) 766.55,1755.26 766.55,1728.07 v1(770.28,1724.34)
Extra: EXTRA_3V3.3 U1R.41 | length 739.7
  Top Layer w7.87: U1R.41 1313.58,1632.92 1601.51,1345 EXTRA_3V3.3
GND: C1.2 C1C.2 C1R.2 C2.2 C2C.1 C2R.2 C3C.2 C3R.2 C4C.2 C4R.2 C5C.2 C5R.2 C6R.2 C7R.2 C8R.2 C9R.2 C10R.2 C11R.2 C12R.2 C13R.2 EXTRA_3V3.1 J1.2 J1R.6 J3.2@1090,577.4 J3.5 J3.6 J3.7 J3.8 J3.9 Q1.6 R6C.2 SW1C.6 SW1R.B1 SW1R.B2 SW2R.B1 SW2R.B2 U1.1 U1C.7 U1R.19 U1R.57 U2C.2 U2R.4 Y1R.2 Y1R.4 | length 1957.2
  Top Layer w7.87: SW1C.6 93.11,1726.31 v1(93.11,1765.68) ; C2C.1 v1(211.22,1932.41) ; v1(203.35,1387.72) 203.35,1383.59 216.14,1370.8 R6C.2 ; v1(274.83,1537.95) 300.52,1563.64 322.41,1563.64 C3C.2 ; v1(294.88,2072.76) SW1R.B2 ; v1(458.27,2072.76) 458.27,2106.31 SW1R.B1@458.39,2106.43 ; v1(531.1,2072.76) SW2R.B2 ; SW2R.B1 695,2109.65 v1(695,2074) ; v1(990,1903.63) 993.77,1899.86 1011.33,1899.86 1019.53,1891.66 U1R.19 ; U1R.57@1179.72,1891.66 v2(1183.66,1895.6)
  Top Layer w8: SW1R.B1@455.71,2109.1 SW1R.B1@458.39,2106.43 ; v1(715.16,1891.66) v1@715.75,1891.66 ; C1C.2@723.03,1386.98 C1C.2 v1(723.03,1421.98) ; Y1R.2 822.76,1861.54 C2R.2 745.87,1861.54 v1@715.75,1891.66 ; Y1R.4 903.27,1925.13 869.74,1891.6 777.62,1891.6 747.44,1921.78 C1R.2 745.87,1921.78 v1@715.75,1891.66
  Top Layer w9.84: v1(754.53,2087.13) C5C.2 C5C.2@798,2087.13
  Top Layer w10: v6(85,895) C2.2 ; v6(160,850) C1.2
  Top Layer w11.81: J1R.6 486.73,1893.35 v2(486.73,1954.98)
  Top Layer w13: J3.5@1775.18,1720.18 v1(1832.59,1720.18) ; J3.6 1784.1,1545.45 1784.1,1476.1 v1(1784,1476) ; J3.7 1782.61,1832.39 1784.1,1833.88 1784.1,1854.52 v1(1786.89,1857.31) ; v1@1881,1878 1883,1876 J3.8 ; v1(1883,1459) J3.9
  Top Layer w15.75: U2C.2 547.54,1394.91 596.36,1394.91 v2(597.05,1395.6) 597.74,1394.91 635.73,1394.91 C4C.2 ; v2(951.91,1631.29) 976.45,1655.83 U1C.7 ; C10R.2 1370.3,1647.34 1395.05,1647.34 v1(1411.02,1663.32) 1411.02,1666.51 1415.94,1671.43 C4R.2 ; v2(1498.43,2058.89) U2R.4 ; v1(1581.3,1749.93) 1589.17,1757.8 C3R.2
  Top Layer w25: C2.2 U1.1 189.45,919.33 200,908.78 C1.2
  other v1: 1880.89,1879.31
  other v2: 1183.66,1808.98 1270.28,1808.98 1270.28,1895.6
  other v4: 1355,930 1395,935 1375,965 1350,987
INT_RP2CAN: U1C.4 U1R.34 | length 314.3
  Top Layer w7.87: U1C.4@1020,1505 1065,1505 1130,1570 1130,1592.58 1185.72,1648.3 1185.72,1682.11 1203.35,1699.73 U1R.34
LEDB_RP2CAN: R8C.1 U1R.18 | length 168.1
  Top Layer w7.87: R8C.1 1023,2019.84 1023,1943.19 1058.78,1907.41 U1R.18
LEDG_RP2CAN: R7C.1 U1R.17 | length 213.3
  Top Layer w7.87: R7C.1 1017.32,2064.89 1027.18,2055.03 1030.1,2055.03 1039.96,2045.18 1039.96,1948.5 1065.3,1923.16 U1R.17
LEDR_RP2CAN: R5C.1 U1R.16 | length 255
  Top Layer w7.87: R5C.1 1017.32,2147.57 1055.71,2109.18 1055.71,1955.02 1071.82,1938.91 U1R.16
MISO_RP2CAN: U1C.12 U1R.31 | length 475
  Top Layer w7.87: U1C.12 817.2,1455.83 993.57,1632.21 1097.69,1632.21 1156.1,1690.62 U1R.31
MOSI_RP2CAN: U1C.11 U1R.30 | length 454.6
  Top Layer w7.87: U1C.11 821.46,1505.83 919.88,1604.26 919.88,1638.24 961.1,1679.46 1122.66,1679.46 1140.35,1697.15 U1R.30
Motor_N: D2.2 J2.2 Q1.7 R8.2 | length 1573.9
  Top Layer w10: J2.2 1520,890 1522,892 1797,892 1840,849 D2.2 1955,814 1955,440 1921,406 1806,406 R8.2@1751.5,460.5
  Top Layer w30: Q1.7@1301,1048 1301.12,1048.12 1322.49,1048.12 1322.63,1047.97 1362.03,1047.97 1520,890 J2.2@1520,779
Motor_P: D3.2 J2.1 Q1.5 R7.2 | length 1074.1
  Top Layer w10: J2.1 1706.1,763.5 1753.5,763.5 R7.2@1765,775 ; R7.2@1768.5,778.5 1843.25,703.75 1843.25,604.75 D3.2
  Top Layer w30: Q1.5 1297.2,877.8 1415.94,759.06 1415.94,681.46 J2.1
nCS_RP2CAN: R4C.2 U1C.13 U1R.28 | length 646.2
  Top Layer w7.87: R4C.2 726.97,1471.39 733.86,1464.5 733.86,1459.97 787.99,1405.83 U1C.13 821.46,1405.83 888.65,1473.02 888.65,1490.35 977.76,1579.46 1074.61,1579.46 v1(1076.16,1577.9) ; U1R.28 1093.11,1749.93 v1(1093.11,1720.8)
  Bottom Layer w7.87: v1(1076.16,1577.9) 1076.16,1580.19 1093.11,1597.14 v1(1093.11,1720.8)
NEG_CTRL: R6.2 U1R.39 | length 373.2
  Top Layer w7.78: U1R.39 1282.09,1346.41 R6.2
NetC2C_2: C2C.2 R2C.2 R3C.2 | length 144.3
  Top Layer w7.87: R3C.2 132.48,1867.45 163.19,1898.16 C2C.2 164.76,1898.16 195.47,1867.45 R2C.2
NetC2R_1: C2R.1 R1R.2 Y1R.3 | length 263.4
  Top Layer w8: C2R.1 747.44,1827.29 763.13,1811.6 869.74,1811.6 903.27,1845.13 Y1R.3 909.88,1844.42 R1R.2
NetD1C_1: D1C.1 R5C.2 | length 80.1
  Top Layer w7.87: D1C.1 916.93,2121.98 946.46,2151.5 R5C.2
NetD1C_2: D1C.2 R7C.2 | length 68.7
  Top Layer w7.87: D1C.2 977.95,2086.54 R7C.2
NetD1C_3: D1C.3 R8C.2 | length 158.5
  Top Layer w7.87: D1C.3 853.94,2086.54 882.48,2058 951.38,2058 979.92,2029.46 R8C.2
NetD2_1: D2.1 R7.1 | length 181.5
  Top Layer w10: R7.1 1768.5,845.5 1835,779 D2.1
NetD3_1: D3.1 R8.1 | length 191.3
  Top Layer w10: R8.1 1797.5,527.5 1861,464 D3.1
NetDNP1_1: DNP1.1 U1R.5 | length 354.7
  Top Layer w7.87: U1R.5 1266.34,2159.8 1392.6,2286.06 DNP1.1
NetDNP1_2: DNP1.2 U1R.4 | length 363.6
  Top Layer w7.87: U1R.4 1282.09,2138.15 1430,2286.06 DNP1.2
NetDNP2_1: DNP2.1 U1R.6 | length 326.4
  Top Layer w7.87: U1R.6 1250.59,2227.95 1308.7,2286.06 DNP2.1
NetDNP2_2: DNP2.2 U1R.7 | length 319.8
  Top Layer w7.87: U1R.7 1234.84,2253.54 1260.47,2279.17 1264.41,2279.17 1271.3,2286.06 DNP2.2
NetDNP3_1: DNP3.1 U1R.8 | length 317.3
  Top Layer w7.87: DNP3.1 1188.7,2286.06 1195.59,2279.17 1199.53,2279.17 1219.09,2259.61 U1R.8
NetDNP3_2: DNP3.2 U1R.9 | length 323.9
  Top Layer w7.87: DNP3.2 1158.19,2283.11 1158.19,2274.81 1203.35,2229.65 U1R.9
NetDNP5_1: DNP5.1 U1R.14 | length 335.1
  Top Layer w7.78: DNP5.1 1050.23,2282.07 1050.23,2273.77 1107,2217 1107,2056.56 1124.61,2038.95 U1R.14
NetDNP5_2: DNP5.2 U1R.13 | length 326.1
  Top Layer w7.87: DNP5.2 1087.59,2282.11 1087.59,2273.41 1140.35,2220.65 U1R.13
NetDNP9_1: DNP9.1 U1R.3 | length 390.3
  Top Layer w7.87: U1R.3 1297.83,2073.9 1510,2286.06 DNP9.1
NetDNP9_2: DNP9.2 U1R.2 | length 399.2
  Top Layer w7.87: U1R.2 1313.58,2052.24 1547.4,2286.06 DNP9.2
NetQ1_1: Q1.1 R5.2 | length 2418
  Top Layer w8: Q1.1 1061.3,1108.35 1182.33,987.33 1182.33,752.67 1555,380 1600,380 ; R5.2 1501.5,1091.5 1612.68,980.32 1834.82,980.32 1971,844.14 1971,411.36 1938.64,379 1600,379
NetQ1_3: Q1.3 R4.1 | length 119.9
  Top Layer w30: R4.1 958.5,1059.5 963.5,1054.5 963.5,1052 1027.62,987.88 Q1.3
NetQ1_4: Q1.4 R2.1 | length 114.2
  Top Layer w30: R2.1 957.5,972 957.5,969.5 999.35,927.65 Q1.4
NetQ1_8: Q1.8 R3.1 | length 98.6
  Top Layer w30: Q1.8 1393.15,1108.35 R3.1
NetQ2_1: Q2.1 R6.1 | length 473.3
  Top Layer w8: Q2.1 862.42,1209.85 862.42,1249.42 881,1268 1274.5,1268 R6.1
NetQ2_2: Q2.2 R4.2 | length 303.3
  Top Layer w8: Q2.2@790,1189.12 790,1101.09 812.19,1078.9 869.9,1078.9 917.5,1126.5 R4.2 ; Q2.2@789.98,1189.14 Q2.2
NetQ2_3: Q2.3 R3.2 | length 572
  Top Layer w8: Q2.3@835,1132.55 889.85,1132.55 924.8,1167.5 R3.2@1392.5,1167.5
NetQ3_1: Q3.1 R1.2 | length 126.2
  Top Layer w8: R1.2 1463,1276 1469.66,1282.66 1490.66,1282.66 Q3.1
NetQ3_2: Q3.2 R5.1 | length 133.6
  Top Layer w8: Q3.2 1519.31,1218.95 1548.5,1189.77 1548.5,1148.5 1568.5,1128.5 R5.1
NetQ3_3: Q3.3 R2.2 | length 1238.5
  Top Layer w8: R2.2 885.5,979.5 869.5,995.5 867,995.5 757,1105.5 757,1236 773.1,1252.1 806.9,1252.1 822.39,1236.61 822.39,1189.96 845.54,1166.8 878.51,1166.8 953,1241.29 1441.29,1241.29 1454.98,1254.98 Q3.3
NetR2C_1: R2C.1 SW1C.2 | length 172.3
  Top Layer w7.87: R2C.1 193.5,1800.13 193.5,1686.94 225,1655.44 SW1C.2
NetR3C_1: R3C.1 SW1C.5 | length 172.3
  Top Layer w7.87: SW1C.5 102.95,1655.44 134.45,1686.94 134.45,1800.13 R3C.1
NetR6C_1: R6C.1 U2C.8 | length 78.7
  Top Layer w7.87: R6C.1 U2C.8
NetR6R_1: R6R.1 SW1R.A2 | length 91.3
  Top Layer w7.87: R6R.1 282.09,2016.66 290.94,2025.52 SW1R.A2
NetR7R_1: R7R.1 SW2R.A1 | length 151.6
  Top Layer w7.87: SW2R.A1 R7R.1
NetU1R_11: U1R.11 | length 13.3
  Top Layer w7.87: U1R.11 U1R.11@1171.85,2000.91
NetU1R_12: U1R.12
NetU1R_15: U1R.15
NetU1R_35: U1R.35
NetU1R_38: U1R.38
POS_CTRL: R1.1 U1R.40 | length 407.6
  Top Layer w7.78: U1R.40 1297.83,1444.17 1371.88,1370.12 1371.88,1350.12 R1.1
QSPI_SCLK_RP2040: U1R.52 U2R.6 | length 286.6
  Top Layer w7.87: U1R.52 1425,1891.66 1463.19,1853.47 1463.19,1810.81 1488.64,1785.36 1524.8,1785.36 1548.43,1808.98 U2R.6@1548.43,1830.64
QSPI_SD0_RP2040: U1R.53 U2R.5 | length 178.4
  Top Layer w7.87: U1R.53 1439.57,1907.41 1498.43,1848.55 U2R.5@1498.43,1830.64
QSPI_SD1_RP2040: U1R.55 U2R.2 | length 436.6
  Top Layer w7.87: U1R.55 1382.11,1938.91 1463.19,2019.98 1463.19,2133.98 1488.64,2159.44 1558.21,2159.44 1558.27,2159.38 1586.62,2159.38 1595.48,2150.52 1595.48,2113.11 U2R.2@1598.43,2110.17
QSPI_SD2_RP2040: U1R.54 U2R.3 | length 309.4
  Top Layer w7.87: U1R.54 1439.57,1923.16 1548.43,2032.02 U2R.3@1548.43,2110.17
QSPI_SD3_RP2040: U1R.51 U2R.7 | length 339.2
  Top Layer w7.87: U1R.51 1411.78,1875.91 1446.95,1840.75 1446.95,1804.78 1482.12,1769.61 1559.06,1769.61 1598.43,1808.98 U2R.7@1598.43,1830.64
QSPI_SS_RP2040: R5R.2 R7R.2 U1R.56 U2R.1 | length 1013.2
  Top Layer w7.87: R7R.2 930.42,2025.52 963.62,1992.32 963.62,1973.91 v1(990.75,1946.78) ; v1(1151.53,1933) 1320.84,1933 1342.49,1954.65 U1R.56 ; U1R.56@1375.59,1954.65 1418.9,1997.96 R5R.2 1418.9,2111.96 1482.12,2175.18 1614.82,2175.18 1642.48,2147.52 1642.48,2146.02 1648.43,2140.07 U2R.1@1648.43,2110.17
  Bottom Layer w7.87: v1(990.75,1946.78) 1137.07,1946.78 1150.85,1933 v1(1151.53,1933)
RUN_RP2040: J1R.4 R4R.2 R6R.2 U1R.26 | length 1275.3
  Top Layer w7.87: R6R.2 282.09,1858.56 361.78,1778.87 ; v1(370.03,1639.69) 368.7,1639.69 326.37,1682.02 326.37,1743.47 361.78,1778.87 ; J1R.4 422.25,1778.87 361.78,1778.87 ; R4R.2 v1(541.93,1639.69) 647.47,1639.69 757.71,1749.93 912.62,1749.93 944.12,1781.43 U1R.26
  Bottom Layer w7.87: v1(370.03,1639.69) v1(541.93,1639.69)
SCK_RP2CAN: U1C.10 U1R.29 | length 400.1
  Top Layer w7.87: U1C.10 824.97,1555.83 902.34,1633.21 902.34,1642.97 954.58,1695.2 1116.14,1695.2 1124.61,1703.67 U1R.29
SCL: DNP7.1 J3.3@1255.35,793.94 U1R.37 | length 1004
  Top Layer w7.87: v5(1215,1315) 1182,1315 DNP7.1 1181,1346.54 1250.59,1416.14 U1R.37
  Bottom Layer w7.87: v5(1215,1315) 1255.35,1274.65 J3.3@1255.35,793.94
SDA: DNP7.2 J3.4@1090,793.94 U1R.36 | length 1010
  Top Layer w7.87: v5(1100,1315) 1142.6,1315 DNP7.2 1143.96,1314.36 1143.96,1335.96 1222,1414 1222,1686.89 1234.84,1699.73 U1R.36
  Bottom Layer w7.87: J3.4@1090,793.94 1097.68,801.62 1097.68,1312.68 v5(1100,1315)
SWCLK_RP2040: J1R.3 U1R.24 | length 606.9
  Top Layer w7.87: J1R.3 547.25,1783 901.15,1783 931.07,1812.92 U1R.24
SWDIO_RP2040: J1R.1 U1R.25 | length 718.6
  Top Layer w7.87: J1R.1 511.81,1737.89 526.37,1723.33 526.37,1693.4 561.78,1658 643.03,1658 752.28,1767.25 907.67,1767.25 937.6,1797.17 U1R.25
TERM_DET_RP2CAN: R1C.2 SW1C.3 U1C.9 | length 723.9
  Top Layer w7.87: SW1C.3 248.62,1724.34 306.88,1666.08 306.88,1646.39 v1(352.95,1600.32) ; R1C.2 R1C.2@726.97,1605.83 ; v1(754.53,1639.69) 733.86,1619.02 733.86,1612.72 R1C.2@726.97,1605.83 ; U1C.9 R1C.2@726.97,1605.83
  Bottom Layer w7.87: v1(352.95,1600.32) 557.68,1600.32 597.05,1639.69 v1(754.53,1639.69)
USB_N: J3.2@1777.68,1643.41 R3R.1 | length 246.1
  Top Layer w7.87: R3R.1 1556.48,1632.52 1556.48,1649.32 1561.09,1653.93 1661.65,1653.93 1665.07,1650.52 1741.06,1650.52 1742.04,1649.54 1771.26,1649.54 J3.2@1775.2,1645.6
USB_P: J3.3@1777.68,1669 R2R.1 | length 246.1
  Top Layer w7.87: R2R.1 1556.48,1691.09 1556.48,1674.29 1561.09,1669.68 1668.18,1669.68 1671.59,1666.27 1741.06,1666.27 1742.04,1667.25 1771.26,1667.25 J3.3@1775.2,1671.19
USB_RP2040_N: R3R.2 U1R.46 | length 267.4
  Top Layer w7.87: U1R.46 1407.71,1797.17 1446.03,1758.85 1446.03,1699.57 1491.67,1653.93 1507.02,1653.93 1511.63,1649.32 1511.63,1632.52 R3R.2
USB_RP2040_P: R2R.2 U1R.47 | length 267.4
  Top Layer w7.87: U1R.47 1414.23,1812.92 1461.78,1765.37 1461.78,1706.09 1498.19,1669.68 1507.02,1669.68 1511.63,1674.29 1511.63,1691.09 R2R.2
XIN_RP2040: C1R.1 U1R.20 Y1R.1 | length 443.1
  Top Layer w7.87: C1R.1 747.93,1954.75 770.28,1954.75 794,1931.03 Y1R.1 833.27,1936.94 866.73,1970.4 929.81,1970.4 943.5,1956.71 943.5,1907.41 975,1875.91 U1R.20
XOUT_RP2040: R1R.1 U1R.21 | length 82.1
  Top Layer w7.87: R1R.1 1018.38,1848.35 1030.2,1860.17 U1R.21
pads on no net: J1. J1.3 J1R.A J1R.B J1R.C J1R.D J1R.E J1R.F J1R.G J2. J3. J3.1@1777.68,1617.82 J3.4@1777.68,1694.59 SW1R.A1 SW2R.A2 U1C.3 U1C.5 U1C.8

## Polygon pours and split planes (outlines as drawn)
GND on Top Layer "GND_L01_P003" (solid, remove dead copper, pour order 3): 1255.35,1069 1415,1069 1415,913.65 1255.35,913.65
3V3_RP2CAN on Top Layer "3V3_RP2040" (solid, remove dead copper, pour order 0): 2000,1283 0,1283 0,2750 2000,2750
3V3_RP2CAN on Top Layer "3V3_RP2CAN_L01_P002" (solid, remove dead copper, pour order 2): 230,900 325,900 345.2,1145 345.2,1295 20,1295 20,985 230,985
GND on Bottom Layer "GND" (solid, remove dead copper, pour order 1): 2000,2750 6.5,2750 6.5,0 2000,0

## Keep-outs
Keep-Out Layer:
  circle w10: c200,200 r130
  circle w10: c1800,200 r130
  circle w10: c200,2550 r130
  circle w10: c1800,2500 r130
  lines w10: 0,250 ccw(c250,250) 250,0

## Other copper
Top Layer:
  pour cut-out: 1155,1854.87 1105,1904.87 1105,1949.87 1195,1949.87 1195,1914.87
  pour cut-out: 1245.22,1961.96 1245,1961.74 1245,1763 1315.62,1763 1324.93,1772.31 1324.93,1844.93 1340,1859.99 1340,1959.99
  pour cut-out: 815,1339.1 1025,1339.1 1030,1344.1 1030,1594.1 890,1594.1 800,1534.1
  pour cut-out: 947.19,1974.79 947.15,1974.82 947.15,1995.22 746.58,1994.1 735.06,1982.58 735.06,1977.94 770.63,1977.94 794.69,1953.88 816.86,1953.88 831.87,1968.89 841.87,1968.89
  pour cut-out: 444.42,1716.25 448.48,1727 448.48,1759.89 442.42,1765.94 412.42,1765.94 412.42,1740.94 422.42,1730.94

## Silkscreen, mask and mechanical layers (free items; w line width, h text height)
Top Overlay:
  drawing of 26 lines, arcs and shapes, not listed
  text "The Underwater Robotics Team" at 780,2570 h40
  text "H-Bridge Board" at 787.5,2455.83 h40
  text "RESET" at 469.88,2188.62 h40 r180
  text "BOOT" at 686.1,2188.62 h40 r180
  text "TERM / ON" at 242.29,1544.1 h40 r180
  text "N" at 1606.67,782.5 h40
  text "CANH" at 282.67,708.79 h35
  text "+12V" at 45,705 h45
  text "+5V" at 175,705.5 h45
  text "GND" at 176.85,613.79 h35
  text "CANL" at 284.55,613.79 h35
  text "P" at 1601.67,572.5 h40
Bottom Overlay:
  drawing of 27 lines, arcs and shapes, not listed
  text "Do it for him" at 1270,1050.72 h200
  text "+12V" at 542.5,887.5 h40
  text "+5V" at 702.18,887.18 h40
  text "CANH" at 887.17,887.18 h40
  text "SDA" at 1150.18,883.24 h40
  text "SCL" at 1307.5,882.5 h40
  text "Motor_N" at 1867.5,779.16 h40
  text "Motor_P" at 1867.5,564.16 h40
  text "GND" at 700.84,452.5 h40
  text "CANL" at 885.83,452.5 h40
  text "GND" at 1142.5,452.5 h40
  text "+5V" at 1307.5,452.5 h40
Top Solder:
  lines w11.81: 200,186.22 200,213.78 ; 200,2536.22 200,2563.78 ; 1800,186.22 1800,213.78 ; 1800,2486.22 1800,2513.78
Bottom Solder:
  region: 194.09,183.27 194.09,216.73 cw(c197.05,216.73) 197.05,219.69 202.95,219.69 cw(c202.95,216.73) 205.91,216.73 205.91,183.27 cw(c202.95,183.27) 202.95,180.31 197.05,180.31 cw(c197.05,183.27)
  region: 1794.09,183.27 1794.09,216.73 cw(c1797.05,216.73) 1797.05,219.69 1802.95,219.69 cw(c1802.95,216.73) 1805.91,216.73 1805.91,183.27 cw(c1802.95,183.27) 1802.95,180.31 1797.05,180.31 cw(c1797.05,183.27)
  region: 1794.09,2483.27 1794.09,2516.73 cw(c1797.05,2516.73) 1797.05,2519.69 1802.95,2519.69 cw(c1802.95,2516.73) 1805.91,2516.73 1805.91,2483.27 cw(c1802.95,2483.27) 1802.95,2480.31 1797.05,2480.31 cw(c1797.05,2483.27)
  region: 194.09,2533.27 194.09,2566.73 cw(c197.05,2566.73) 197.05,2569.69 202.95,2569.69 cw(c202.95,2566.73) 205.91,2566.73 205.91,2533.27 cw(c202.95,2533.27) 202.95,2530.31 197.05,2530.31 cw(c197.05,2533.27)

## Text inside footprints (layer, text, board x,y; h text height)
Q1: Top Overlay "*" at 1022.3,1133.35 h50